# Altium PCB PCB1.PcbDoc
Units mm, origin at the board's own origin, x right, y up, seen from the top; angles counter-clockwise.
Board outline 70.48 x 69.98 mm, 2 copper layers (Top Layer, Bottom Layer); 62 components, 52 nets, 140 pads, 22 vias.
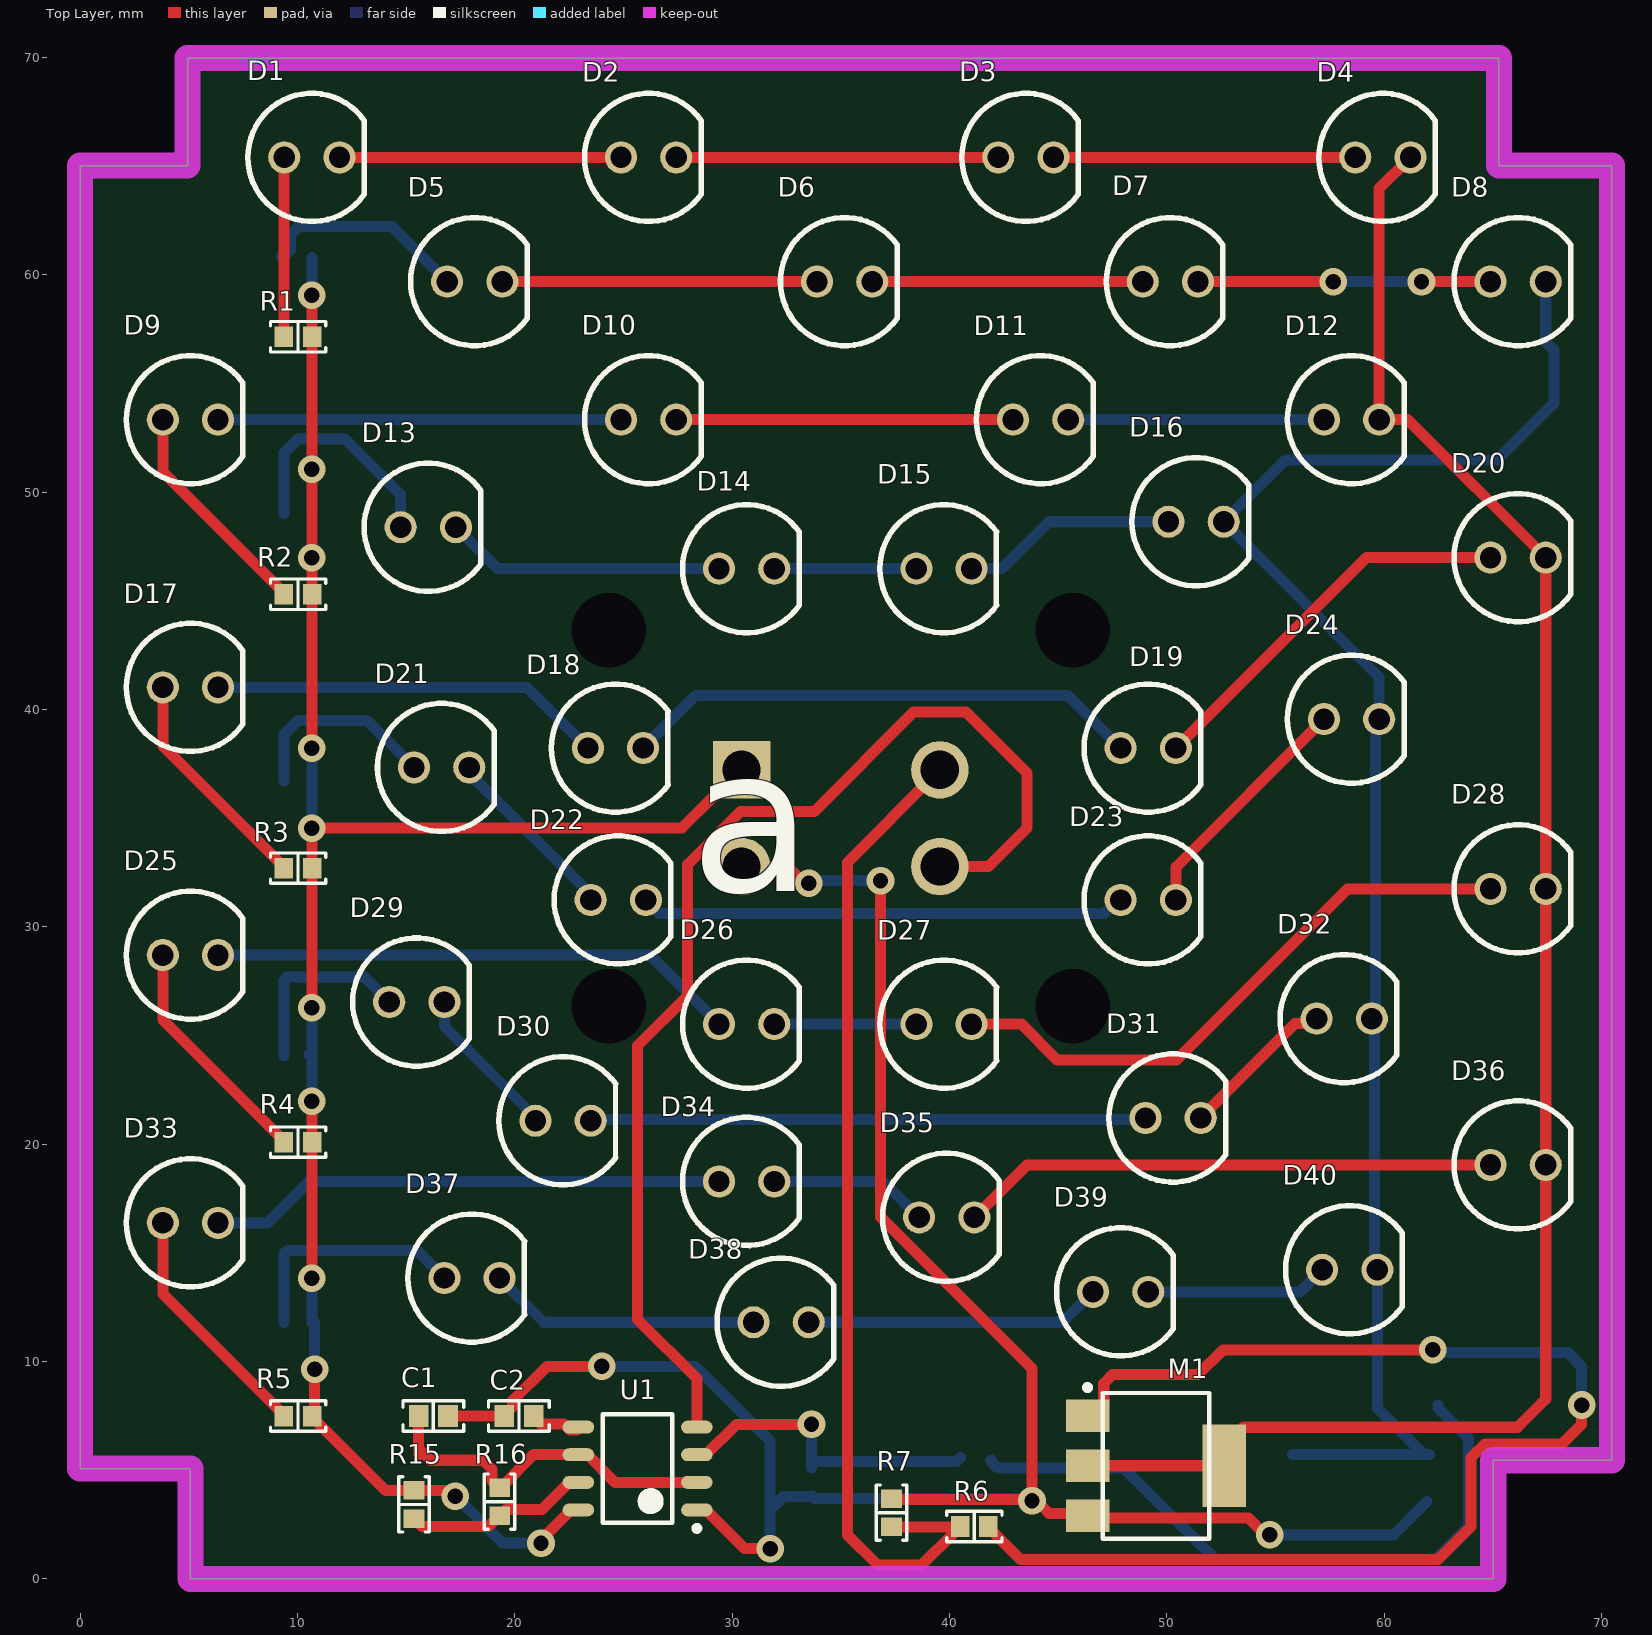
[diagram p0: Top Layer view]
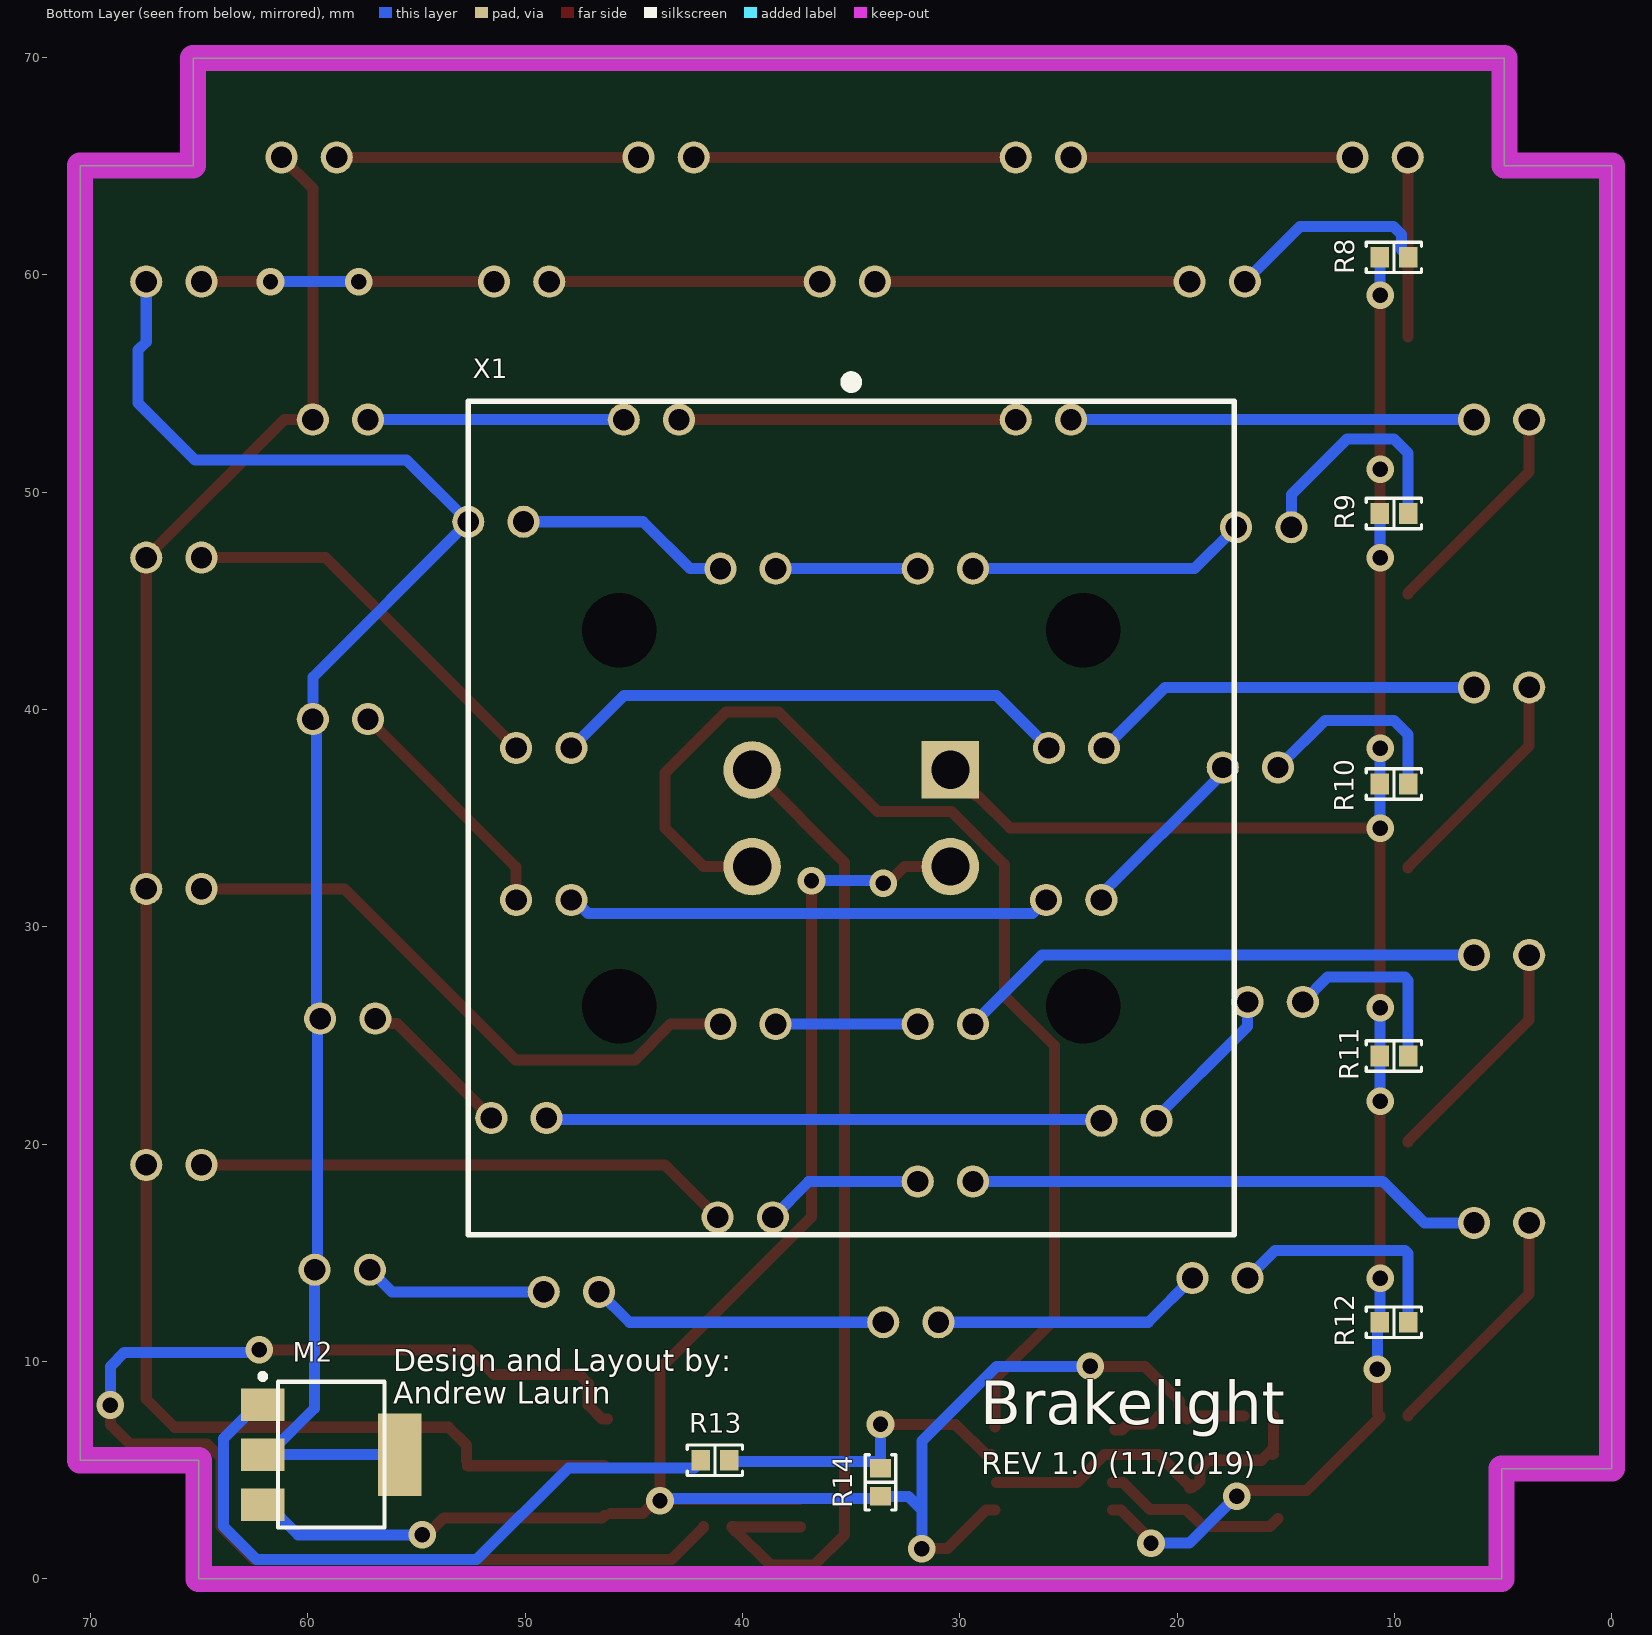
[diagram p1: Bottom Layer view, seen from below]
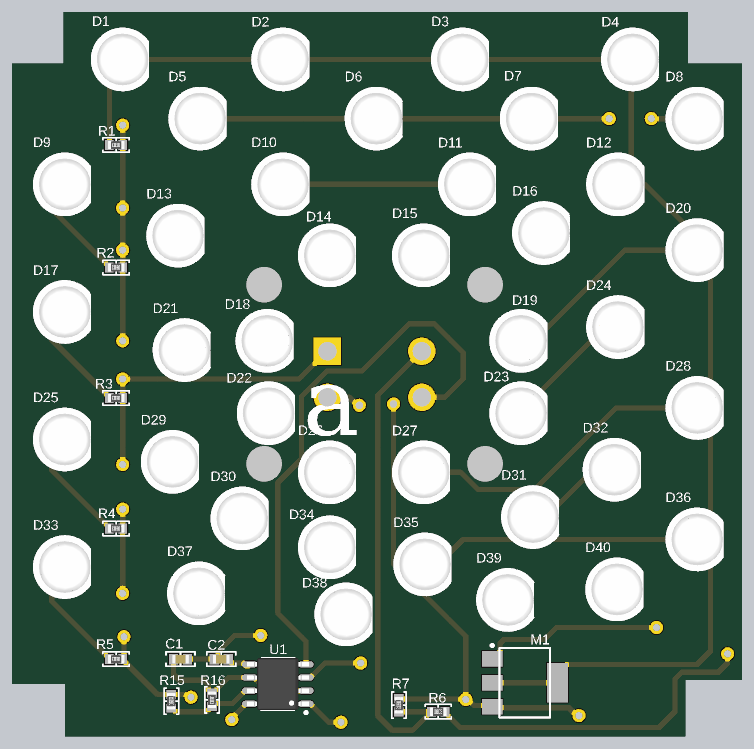
[diagram p2: 3D render of the assembled board from above, using the file's embedded part models]
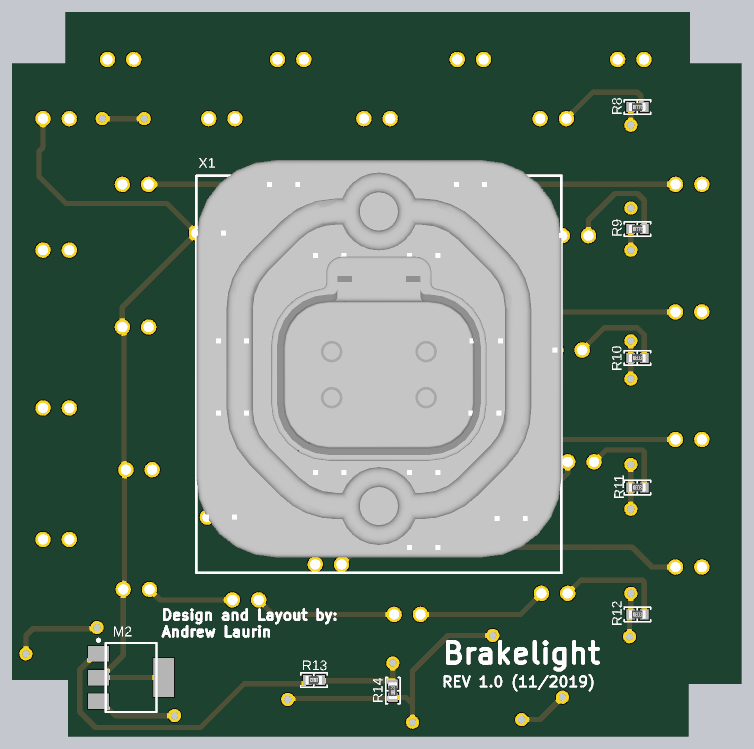
[diagram p3: 3D render of the assembled board from below, using the file's embedded part models]

## Layer stack, top to bottom
Top Solder: solder mask 0.0102, Solder Resist, Dk 3.5
Top Layer: signal copper 0.0356
Dielectric 1: dielectric 0.32, FR-4, Dk 4.8
Bottom Layer: signal copper 0.0356
Bottom Solder: solder mask 0.0102, Solder Resist, Dk 3.5

## Board outline
0,5.08 0,65.024 4.953,65.024 4.953,69.977 65.278,69.977 65.278,65.024 70.485,65.024 70.485,5.461 65.024,5.461 65.024,0 5.08,0 5.08,5.08
cut-out: 82.1,135.001

## Design rules (kind name [scope] priority, off if disabled: settings)
Clearance Clearance_1 [All] p1: gap=0.254 ignorepadtopadclearanceinfootprint=FALSE except(0: Arc-Hole Track-Hole SMDPad-Hole THPad-Hole Via-Hole Fill-Hole Poly-Hole Region-Hole Text-Hole)
Clearance [All] p2: gap=0.254 ignorepadtopadclearanceinfootprint=FALSE except(0: Arc-Hole Track-Hole SMDPad-Hole THPad-Hole Via-Hole Fill-Hole Poly-Hole Region-Hole Text-Hole)
Height [All] p1 off: minheight=0 maxheight=25.4 prefheight=12.7
HoleSize [All] p1: absolutevalues=TRUE maxlimit=3.81 minlimit=0.025 maxpercent=80.000 minpercent=20.000
MinimumSolderMaskSliver [All] p1: minsoldermaskwidth=0.203
PolygonConnect [All] p1: connectstyle=Relief reliefconductorwidth=0.254 reliefentries=4 polygonreliefangle="90 Angle" airgapwidth=0.254
RoomDefinition U_Generic_555_Astable [InComponentClass('U_Generic_555_Astable')] p1: confinementstyle=ConfineIn formatcopy=TRUE lockcomponents=FALSE outline 14.155,1.636 29.834,1.636 29.834,8.89 14.155,8.89
RoutingVias [All] p1: holewidth=0.711 width=1.27 viastyle="Through Hole" minholewidth=0.711 minwidth=1.27 maxholewidth=0.711 maxwidth=1.27
SilkToSilkClearance [All] p1 off: silktosilkclearance=0.254
SilkToSolderMaskClearance [IsPad] p1 off: minsilkscreentomaskgap=0.254 clearancetoexposedcopper=TRUE
SolderMaskExpansion [All] p1: expansion=0.102
Width [All] p1: maxlimit=0.762 minlimit=0.254 preferedwidth=0.508 minimp=50.000000 maximp=50.000000 favimp=50.000000
25 further rules are at their usual default settings.

## Classes and differential pairs
component class U_Generic_555_Astable: C1 C2 R15 R16 U1
component class "Break Light Schematic": D1 D2 D3 D4 D5 D6 D7 D8 D9 D10 D11 D12 D13 D14 D15 D16 D17 D18 D19 D20 D21 D22 D23 D24 D25 D26 D27 D28 D29 D30 D31 D32 D33 D34 D35 D36 D37 D38 D39 D40 M1 M2 R1 R2 R3 R4 R5 R6 R7 R8 R9 R10 R11 R12 R13 R14 X1

## Components (designator, comment, footprint, x,y, rotation, side; value= is the part's Value field where it differs from the comment)
C1 "capacitor" 0603 16.256,7.493 r180 top
C2 "capacitor" 0603 20.193,7.493 r0 top
D1 "LED" "LED TH" 10.668,65.405 r0 top
D2 "LED" "LED TH" 26.162,65.405 r0 top
D3 "LED" "LED TH" 43.519,65.405 r0 top
D4 "LED" "LED TH" 59.944,65.405 r0 top
D5 "LED" "LED TH" 18.161,59.69 r0 top
D6 "LED" "LED TH" 35.179,59.69 r0 top
D7 "LED" "LED TH" 50.165,59.69 r0 top
D8 "LED" "LED TH" 66.167,59.69 r0 top
D9 "LED" "LED TH" 5.08,53.34 r0 top
D10 "LED" "LED TH" 26.162,53.34 r0 top
D11 "LED" "LED TH" 44.196,53.34 r0 top
D12 "LED" "LED TH" 58.505,53.34 r0 top
D13 "LED" "LED TH" 16.023,48.387 r0 top
D14 "LED" "LED TH" 30.673,46.482 r0 top
D15 "LED" "LED TH" 39.751,46.482 r0 top
D16 "LED" "LED TH" 51.35,48.641 r0 top
D17 "LED" "LED TH" 5.08,41.021 r0 top
D18 "LED" "LED TH" 24.638,38.227 r0 top
D19 "LED" "LED TH" 49.149,38.227 r0 top
D20 "LED" "LED TH" 66.167,46.99 r0 top
D21 "LED" "LED TH" 16.637,37.338 r0 top
D22 "LED" "LED TH" 24.765,31.242 r0 top
D23 "LED" "LED TH" 49.149,31.242 r0 top
D24 "LED" "LED TH" 58.505,39.56 r0 top
D25 "LED" "LED TH" 5.08,28.702 r0 top
D26 "LED" "LED TH" 30.673,25.527 r0 top
D27 "LED" "LED TH" 39.751,25.527 r0 top
D28 "LED" "LED TH" 66.167,31.75 r0 top
D29 "LED" "LED TH" 15.494,26.543 r0 top
D30 "LED" "LED TH" 22.225,21.082 r0 top
D31 "LED" "LED TH" 50.292,21.209 r0 top
D32 "LED" "LED TH" 58.166,25.781 r0 top
D33 "LED" "LED TH" 5.08,16.383 r0 top
D34 "LED" "LED TH" 30.673,18.288 r0 top
D35 "LED" "LED TH" 39.878,16.637 r0 top
D36 "LED" "LED TH" 66.167,19.05 r0 top
D37 "LED" "LED TH" 18.034,13.843 r0 top
D38 "LED" "LED TH" 32.258,11.811 r0 top
D39 "LED" "LED TH" 47.879,13.208 r0 top
D40 "LED" "LED TH" 58.42,14.224 r0 top
M1 "*" SOT-223-3 49.505,5.207 r0 top
M2 "*" SOT-223-3 58.928,5.715 r180 bottom
R1 "390" "RES 0603/1608" 10.033,57.15 r180 top
R2 "390" "RES 0603/1608" 10.033,45.307 r180 top
R3 "390" "RES 0603/1608" 10.033,32.703 r180 top
R4 "390" "RES 0603/1608" 10.033,20.098 r180 top
R5 "390" "RES 0603/1608" 10.033,7.493 r180 top
R6 "1k" "RES 0603/1608" 41.148,2.413 r0 top
R7 "1k" "RES 0603/1608" 37.338,3.048 r270 top
R8 "390" "RES 0603/1608" 10.033,60.805 r180 bottom
R9 "390" "RES 0603/1608" 10.033,49.022 r180 bottom
R10 "390" "RES 0603/1608" 10.033,36.576 r180 bottom
R11 "390" "RES 0603/1608" 10.033,24.059 r180 bottom
R12 "390" "RES 0603/1608" 10.033,11.811 r180 bottom
R13 "1k" "RES 0603/1608" 41.275,5.461 r0 bottom
R14 "1k" "RES 0603/1608" 33.655,4.445 r90 bottom
R15 "6.8k" "RES 0603/1608" 15.367,3.429 r90 top
R16 "3.3k" "RES 0603/1608" 19.304,3.556 r270 top
U1 "LM555 Timer" SOIC-8 25.654,5.08 r180 top
X1 "*" DT15-4P 35,35 r180 bottom locked

## Footprints (in the part's own frame and the unit in brackets; to place one, negate y for a bottom-side part, rotate by r counter-clockwise, add the part's x,y. Pads: shape width x height; smd on the part's side, far side on the other; paste and mask are expansions set on the pad)
0603 [mm]
  rect 0.9x1 smd: 1(-0.675,0) 2(0.675,0)
  silkscreen extent -1.4,-0.7 1.4,0.7, body extent -0.8,-0.41 0.8,0.41, height 0.82
DT15-4P [mm]
  rect 2.64x2.64 hole 1.76: 1(4.56,2.225)
  round 2.64 hole 1.76: 2(4.56,-2.225) 3(-4.56,-2.225) 4(-4.56,2.225)
  round 1 hole 3.429 unplated: ""(-10.67,-8.65) ""(-10.67,8.65) ""(10.67,-8.65) ""(10.67,8.65)
  silkscreen extent -17.62,-19.18 17.62,20.32, body extent -17.63,-17.68 17.63,20.68, height 30.35
"LED TH" [mm]
  round 1.48 hole 0.98: 1(-1.27,0) 2(1.27,0)
  silkscreen extent -2.95,-2.95 2.42,2.95, body extent -3,-3 2.5,3, height 8.8
"RES 0603/1608" [mm] "Chip Resistor, 2-Leads, Body 1.60x0.80mm, IPC Medium Density"
  rect 0.85x0.95 smd: 1(-0.65,0) 2(0.65,0)
  silkscreen extent -1.27,-0.7 1.27,0.7, body extent -0.8,-0.4 0.8,0.4, height 0.45
SOIC-8 [mm] "SOIC, 8-Leads, Body 4.90x3.90mm, Pitch 1.27mm, IPC Medium Density"
  oval 1.45x0.6 smd: 1(-2.725,1.905) 2(-2.725,0.635) 3(-2.725,-0.635) 4(-2.725,-1.905) 5(2.725,-1.905) 6(2.725,-0.635) 7(2.725,0.635) 8(2.725,1.905)
  silkscreen extent -2.85,-2.5 1.6,2.88, body extent -3,-2.5 3,2.5, height 1.75
SOT-223-3 [mm] "SOT223127P600-8N, NCP1117STAT3G, MMBT4403-7-F"
  rect 2x1.5 smd: 1(-3.15,2.3) 2(-3.15,0) 3(-3.15,-2.3)
  rect 2x3.8 smd: THM(3.15,0)
  silkscreen extent -3.27,-3.35 2.45,3.72, body extent -1.85,-3.35 1.85,3.35, height 1.8

## Part data
C1: library part 1, "Generic 0603 capacitor", capacitance=0.1uF, Dielectric=Ceramic, package=0603, percent tolerance=10, voltage=50, ESR=1, id=1, name="0603 Capacitor", quantity=0
C2: library part 1, "Generic 0603 capacitor", capacitance=0.01uF, Dielectric=Ceramic, package=0603, percent tolerance=10, voltage=50, ESR=1, id=1, name="0603 Capacitor", quantity=0
D1 D2 D3 D4 D5 D6 D7 D8 D9 D10 D11 D12 D13 D14 D15 D16 D17 D18 D19 D20 D21 D22 D23 D24 D25 D26 D27 D28 D29 D30 D31 D32 D33 D34 D35 D36 D37 D38 D39 D40: library part 23, "Thru Hole LED", id=23
M1 M2: library part 20, "N-Channel 450V 600mA (Tc) 3W (Ta) Surface Mo", current=0.6A, package=SOT-223-3, id=20, link=https://www.digikey.com/product-detail/en/stmicroelectronics/STN3N45K3/497-10649-1-ND/2346728, name=STN3N45K3, numcircuits=1, quantity=0, rdson=3.3Ohm, Type=N_Channel, vdsmax=0, vgsmax=30, vt=3.75
R1 R2 R3 R4 R5 R6 R7 R8 R9 R10 R11 R12 R13 R14 R15 R16: library part 1, package=0603, percent tolerance=5, id=1, name="0603 Resistor", quantity=0
  R1 R2 R3 R4 R5 R8 R9 R10 R11 R12: resistance=390
  R6 R7 R13 R14: resistance=1k
  R15: resistance=6.8k
  R16: resistance=3.3k
U1: library part 17, id=17, quantity=0
X1: library part 32, "DT15-4P Connector for Brakelight", createdby=Andrew, id=32, link=https://www.te.com/usa-en/product-DT15-4P.html?source=header-match, name=DT15-4P, numcontacts=4, numrows=2, Pitch=9.12mm, quantity=0

## Via types
v1: diameter 1.27, hole 0.711, Top Layer to Bottom Layer, 22 vias

## Nets (pads, with @x,y where several pads share a name; then routed paths per layer and width w, separated by ;. In a path a pad name is that pad's centre, name@x,y a point inside that pad or via, vN(x,y) a via of type N, cw(c..) or ccw(c..) an arc to the next point about the centre after c; other vN are vias at no path point)
+12: R1.1 R2.1 R3.1 R4.1 R5.1 R8.1 R9.1 R10.1 R11.1 R12.1 R15.2 U1.8 X1.1 | length 92.1
  Top Layer w0.508: v1(10.668,13.843) R4.1@10.668,20.066 ; v1(10.668,21.971) 10.683,21.956 R4.1 ; v1(10.668,26.289) R3.1@10.668,32.639 ; v1@10.668,34.29 10.683,34.275 R3.1 ; v1(10.668,34.544) 27.686,34.544 29.174,36.032 29.247,36.032 30.353,37.138 X1.1@30.353,37.211 ; v1(10.668,38.227) 10.668,46.863 v1@10.795,46.99 ; v1@10.668,51.181 v1(10.668,51.054) ; R1.1@10.668,57.023 v1(10.668,59.055) ; v1@10.683,46.975 v1(10.668,46.99) v1(10.668,51.054) ; R1.1 10.683,51.069 v1(10.668,51.054) ; v1(10.795,9.652) 10.795,7.605 R5.1 10.683,7.443 14.062,4.064 R15.2@15.367,4.064 ; R15.2 16.876,4.079 v1@17.272,3.683 ; v1(21.209,1.651) 21.209,1.786 22.598,3.175 U1.8 U1.8@22.987,3.175
  Bottom Layer w0.508: R11.1@10.541,24.13 10.668,24.003 v1(10.668,21.971) ; v1@10.668,13.716 10.683,13.701 R12.1@10.683,11.923 ; v1(10.668,26.289) 10.668,24.074 R11.1 ; v1(10.668,34.544) R10.1@10.668,36.576 ; v1(10.668,46.99) R9.1@10.668,49.022 ; v1@10.668,58.928 v1(10.668,59.055) 10.668,60.79 R8.1 ; R12.1 R12.1@10.683,11.923 ; R10.1 10.683,38.115 v1@10.795,38.227 ; v1(10.795,9.652) 10.795,11.811 R12.1@10.683,11.923 ; v1(17.272,3.81) 19.431,1.651 v1(21.209,1.651)
GND: C1.1 C2.1 M1.3 M2.3 R7.1 R14.1 U1.1 X1.2 | length 102.3
  Top Layer w0.508: C1.1 C2.1 ; C2.1@19.558,7.366 19.558,7.583 19.91,7.935 19.91,8.203 21.486,9.779 v1(24.003,9.779) ; U1.1 28.804,3.175 30.582,1.397 v1@31.496,1.397 ; X1.2@30.607,32.639 30.743,32.775 32.551,32.775 33.322,32.004 v1(33.528,32.004) ; v1@36.703,31.877 36.732,31.877 36.83,31.779 36.83,16.65 43.8,9.68 v1(43.8,3.6) 44.006,3.6 44.593,3.013 M1.3@46.088,3.013 ; R7.1 37.387,3.649 43.776,3.649 v1@43.8,3.625 ; M1.3 46.463,2.799 53.764,2.799 54.483,2.08 v1@54.483,1.905
  Bottom Layer w0.508: v1@23.876,9.779 v1(24.003,9.779) 28.321,9.779 31.75,6.35 31.75,3.175 ; v1(31.75,1.397) 31.75,3.175 ; v1@33.401,32.131 v1(36.83,32.131) ; R14.1 R14.1@33.705,3.795 ; R14.1@33.655,3.81 33.64,3.795 32.37,3.795 31.75,3.175 ; R14.1@33.7,3.825 33.828,3.698 43.702,3.698 v1(43.8,3.6) ; v1(54.737,2.032) 60.445,2.032 61.969,3.556 M2.3@61.976,3.556
NetC1_2: C1.2 R16.1 U1.2 U1.6 | length 16.6
  Top Layer w0.508: 15.581,5.755 15.621,5.715 ; C1.2 15.581,6.009 16.129,5.461 18.542,5.461 18.956,5.047 18.956,4.504 19.142,4.318 R16.1@19.304,4.318 ; R16.1 19.354,4.206 R16.1@19.385,4.237 ; R16.1@19.36,4.262 R16.1@19.385,4.237 ; R16.1@19.431,4.191 R16.1@19.385,4.237 ; U1.2@28.321,4.445 24.624,4.445 23.354,5.715 U1.6 20.863,5.715 R16.1@19.385,4.237
NetC2_2: C2.2 U1.5 | length 2.3
  Top Layer w0.508: C2.2 20.868,7.443 21.191,7.12 22.275,7.12 22.537,6.858 U1.5@22.86,6.858
NetD1_1: D1.1 R1.2 | length 8.3
  Top Layer w0.508: R1.2 9.391,57.158 9.391,65.398 D1.1
NetD1_2: D1.2 D2.1 | length 13.1
  Top Layer w0.508: D1.2 D2.1 D2.1@25.019,65.405
NetD2_2: D2.2 D3.1 | length 14.9
  Top Layer w0.508: D2.2 42.164,65.405 D3.1@42.291,65.532
NetD3_2: D3.2 D4.1 | length 13.9
  Top Layer w0.508: D3.2 D4.1
NetD4_2: D4.2 D12.2 D20.2 D28.2 D36.2 M1.2 M1.THM | length 84.8
  Top Layer w0.508: M1.2 M1.THM ; M1.THM@52.705,5.461 52.705,6.157 53.528,6.98 66.14,6.98 67.437,8.277 D36.2 67.437,31.623 D28.2@67.564,31.75 ; D12.2@59.69,53.721 D12.2@59.775,53.636 ; D12.2 D12.2@59.775,53.636 ; D4.2@61.214,65.659 D4.2 59.775,63.966 D12.2@59.775,53.636 ; D28.2 D20.2 61.087,53.34 60.071,53.34 D12.2@59.775,53.636
NetD5_1: D5.1 R8.2 | length 9.8
  Bottom Layer w0.508: R8.2@9.271,60.833 9.361,60.833 R8.2@9.383,60.855 ; R8.2 R8.2@9.383,60.855 ; D5.1 D5.1@16.764,59.817 ; D5.1@16.891,59.817 D5.1@16.764,59.817 ; R8.2@9.383,60.855 9.681,61.153 9.681,61.856 10.055,62.23 14.351,62.23 D5.1@16.764,59.817
NetD5_2: D5.2 D6.1 | length 14.4
  Top Layer w0.508: D5.2 33.655,59.69 D6.1@33.782,59.817
NetD6_2: D6.2 D7.1 | length 12.6
  Top Layer w0.508: D6.2 D7.1 D7.1@49.022,59.69
NetD7_2: D7.2 D8.1 | length 13.4
  Top Layer w0.508: D7.2 v1(57.658,59.69) ; v1@61.849,59.69 D8.1
  Bottom Layer w0.508: v1(57.658,59.69) 61.595,59.69 v1@61.722,59.817
  other v1: 61.722,59.69
NetD8_2: D8.2 D16.2 D24.2 D32.2 D40.2 M2.2 M2.THM | length 76.8
  Bottom Layer w0.508: D16.2 55.468,51.489 65.205,51.489 67.818,54.102 67.818,56.54 67.437,56.921 67.437,59.563 D8.2@67.691,59.817 ; D16.2@52.705,48.641 52.705,48.556 59.775,41.487 D24.2@59.775,39.582 ; M2.THM M2.2@61.828,5.715 ; D32.2 59.605,25.95 59.605,39.412 D24.2@59.775,39.582 ; D32.2@59.563,25.781 59.563,14.351 D40.2 59.69,7.853 M2.2@61.828,5.715 ; D24.2 D24.2@59.775,39.582 ; D24.2@59.817,39.624 D24.2@59.775,39.582 ; M2.2 M2.2@61.828,5.715
NetD9_1: D9.1 R2.2 | length 10.5
  Top Layer w0.508: D9.1@3.683,53.467 D9.1 3.81,50.93 9.383,45.357 R2.2
NetD9_2: D9.2 D10.1 | length 18.7
  Bottom Layer w0.508: D9.2 D10.1 D10.1@25.019,53.467
NetD10_2: D10.2 D11.1 | length 15.5
  Top Layer w0.508: D10.2 D11.1
NetD11_2: D11.2 D12.1 | length 11.8
  Bottom Layer w0.508: D11.2 D12.1
NetD13_1: D13.1 R9.2 | length 11.1
  Bottom Layer w0.508: R9.2@9.398,49.037 R9.2 9.383,51.801 10.033,52.451 12.192,52.451 14.753,49.89 14.753,48.535 D13.1@14.732,48.514 ; D13.1@14.859,48.514 D13.1@14.859,48.768
NetD13_2: D13.2 D14.1 | length 13
  Bottom Layer w0.508: D13.2 19.198,46.482 29.337,46.482 D14.1@29.464,46.609
NetD14_2: D14.2 D15.1 | length 6.7
  Bottom Layer w0.508: D14.2 D15.1 D15.1@38.608,46.609
NetD15_2: D15.2 D16.1 | length 10
  Bottom Layer w0.508: D15.2 42.418,46.482 44.577,48.641 49.911,48.641 D16.1@50.038,48.514
NetD17_1: D17.1 R3.2 | length 10.8
  Top Layer w0.508: D17.1@3.81,41.148 D17.1 3.81,38.326 9.383,32.752 R3.2
NetD17_2: D17.2 D18.1 | length 18.1
  Bottom Layer w0.508: D17.2 20.574,41.021 23.241,38.354 D18.1@23.241,38.227
NetD18_2: D18.2 D19.1 | length 23.7
  Bottom Layer w0.508: D18.2 28.321,40.64 45.466,40.64 47.625,38.481 D19.1@47.625,38.354
NetD19_2: D19.2 D20.1 | length 18.2
  Top Layer w0.508: D19.2 59.182,46.99 64.643,46.99 D20.1@64.897,47.244
NetD21_1: D21.1 R10.2 | length 9.2
  Bottom Layer w0.508: R10.2@9.383,36.703 9.383,38.847 10.033,39.497 13.208,39.497 15.24,37.465 D21.1@15.367,37.465
NetD21_2: D21.2 D22.1 | length 8.3
  Bottom Layer w0.508: D21.2 17.907,37.084 D22.1@23.622,31.369
NetD22_2: D22.2 D23.1 | length 22.2
  Bottom Layer w0.508: D22.2 26.67,30.607 47.117,30.607 D23.1@47.752,31.242
NetD23_2: D23.2 D24.1 | length 11.3
  Top Layer w0.508: D23.2 50.419,32.745 D24.1 57.277,39.603 D24.1@57.277,39.751
NetD25_1: D25.1 R4.2 | length 11
  Top Layer w0.508: D25.1@3.81,28.829 D25.1 3.81,25.721 9.383,20.148 R4.2
NetD25_2: D25.2 D26.1 | length 24.3
  Bottom Layer w0.508: D25.2 26.228,28.702 29.149,25.781 D26.1@29.464,25.781
NetD26_2: D26.2 D27.1 | length 6.6
  Bottom Layer w0.508: D26.2 38.227,25.527 D27.1@38.481,25.781
NetD27_2: D27.2 D28.1 | length 27.7
  Top Layer w0.508: D27.2 43.309,25.527 44.96,23.876 50.447,23.876 58.321,31.75 64.643,31.75 D28.1@64.77,31.877
NetD29_1: D29.1 R11.2 | length 9
  Bottom Layer w0.508: R11.2 9.383,27.537 9.532,27.686 13.081,27.686 D29.1 D29.1@14.351,26.543
NetD29_2: D29.2 D30.1 | length 7.2
  Bottom Layer w0.508: D29.2 16.764,25.422 21.082,21.104 D30.1@21.082,21.082
NetD30_2: D30.2 D31.1 | length 25.5
  Bottom Layer w0.508: D30.2 23.558,21.145 48.831,21.145 D31.1@48.895,21.209
NetD31_2: D31.2 D32.1 | length 7.3
  Top Layer w0.508: D31.2 55.899,25.546 56.534,25.546 D32.1@56.896,25.908
NetD33_1: D33.1 R5.2 | length 11.3
  Top Layer w0.508: D33.1@3.683,16.383 3.81,16.256 3.81,13.116 9.383,7.543 R5.2
NetD33_2: D33.2 D34.1 | length 23.8
  Bottom Layer w0.508: D33.2 8.636,16.383 10.541,18.288 D34.1@29.337,18.288
NetD34_2: D34.2 D35.1 | length 7.5
  Bottom Layer w0.508: D34.2 36.957,18.288 D35.1 D35.1@38.735,16.637
NetD35_2: D35.2 D36.1 | length 24.6
  Top Layer w0.508: D35.2 43.561,19.05 D36.1@64.77,19.05
NetD37_1: D37.1 R12.2 | length 11.1
  Bottom Layer w0.508: R12.2 9.383,14.964 9.532,15.113 15.494,15.113 D37.1
NetD37_2: D37.2 D38.1 | length 12.5
  Bottom Layer w0.508: D37.2 21.336,11.811 D38.1
NetD38_2: D38.2 D39.1 | length 13.7
  Bottom Layer w0.508: D38.2 45.212,11.811 D39.1
NetD39_2: D39.2 D40.1 | length 8.5
  Bottom Layer w0.508: D39.2 56.134,13.208 D40.1 D40.1@57.277,14.224
NetM1_1: M1.1 R6.2 | length 59.7
  Top Layer w0.508: R6.2 41.798,2.363 43.272,0.889 62.484,0.889 64.008,2.413 64.008,5.588 64.638,6.218 68.194,6.218 69.088,7.112 v1@69.088,7.62 ; M1.1@46.228,7.366 46.464,7.366 47.101,8.003 47.101,9.001 47.498,9.398 51.435,9.398 52.578,10.541 v1(62.23,10.541)
  Bottom Layer w0.508: v1@62.23,10.287 62.357,10.414 68.453,10.414 69.088,9.779 v1(69.088,8.001)
NetM2_1: M2.1 R13.2 | length 30.7
  Bottom Layer w0.508: R13.2 41.925,5.411 42.223,5.113 48.019,5.113 52.243,0.889 62.357,0.889 63.881,2.413 63.881,6.462 62.484,7.859 M2.1@62.484,8.001
NetR6_1: R6.1 R7.2 X1.4 | length 46.6
  Top Layer w0.508: R7.2 40.371,2.398 R6.1@40.386,2.413 ; X1.4@39.37,37.338 39.37,37.035 35.306,32.971 35.306,2.032 36.703,0.635 38.72,0.635 40.277,2.192 40.327,2.192 40.498,2.363 R6.1
NetR13_1: R13.1 R14.2 U1.3 | length 14.2
  Top Layer w0.508: U1.3@28.575,5.715 28.804,5.715 30.201,7.112 v1(33.655,7.112)
  Bottom Layer w0.508: R14.2 v1@33.655,6.985 ; R14.2@33.953,5.393 40.327,5.393 40.513,5.579 R13.1@40.513,5.588
NetR15_1: R15.1 R16.2 U1.7 | length 8.6
  Top Layer w0.508: R15.1 15.733,2.413 18.796,2.413 R16.2@19.304,2.921 ; R16.2 19.602,3.204 21.263,3.204 22.504,4.445 U1.7 U1.7@22.987,4.445
NetU1_4: U1.4 X1.3 | length 54.9
  Top Layer w0.508: U1.4 28.379,9.213 25.654,11.938 25.654,24.531 27.94,26.817 27.94,32.86 30.388,35.308 33.784,35.308 38.354,39.878 40.767,39.878 43.561,37.084 43.561,34.544 41.792,32.775 39.742,32.775 X1.3@39.624,32.893
pads on no net: X1.

## Keep-outs
Keep-Out Layer:
  the board outline again, w1.2

## Silkscreen, mask and mechanical layers (free items; w line width, h text height)
Top Overlay:
  text "a" at 28.075,29.15 h13
Bottom Overlay:
  text "Design and Layout by: / Andrew Laurin" at 56.075,8.05 h1
  text "Brakelight" at 29.075,7.125 h2
  text "REV 1.0 (11/2019)" at 29.025,4.825 h1
Mechanical 1:
  lines w0.254: 0,5.08 5.08,5.08 5.08,0 65.024,0 65.024,5.461 70.485,5.461 70.485,65.024 70.358,65.024 65.278,65.024 65.278,69.977 4.953,69.977 4.953,65.024 0,65.024 0,5.08